# Altium PCB 转叶板-转叶.PcbDoc
Units mm, origin at the board's own origin, x right, y up, seen from the top; angles counter-clockwise.
Board outline 100.1 x 6.1 mm, 2 copper layers (Top Layer, Bottom Layer); 31 components, 28 nets, 115 pads, 0 vias.
Unrouted connection lines stored in the file: 78.
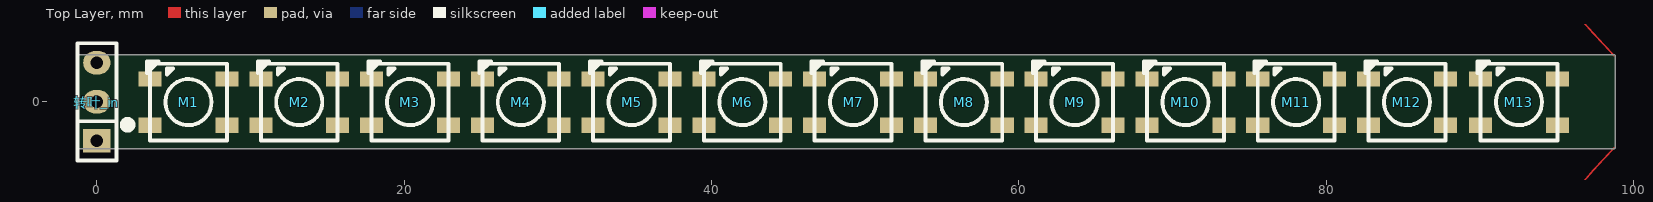
[diagram p0: Top Layer view]
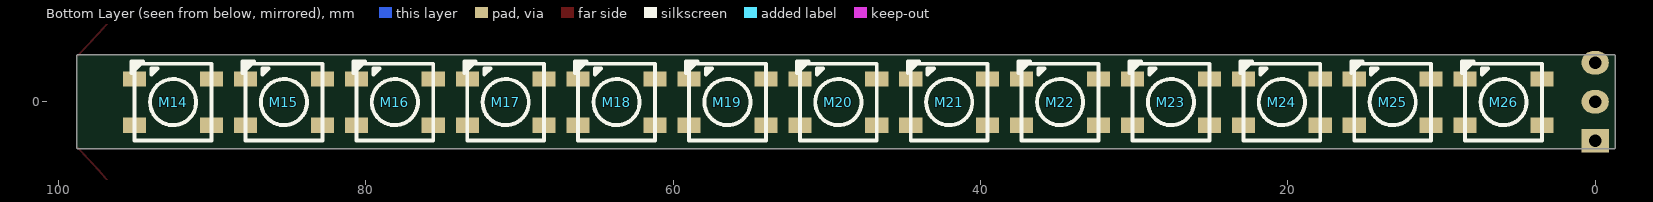
[diagram p1: Bottom Layer view, seen from below]

## Layer stack, top to bottom
Top Solder: solder mask 0.0102, Solder Resist, Dk 3.5
Top Layer: signal copper 0.0356
Dielectric 1: dielectric 0.32, FR-4, Dk 4.8
Bottom Layer: signal copper 0.0356
Bottom Solder: solder mask 0.0102, Solder Resist, Dk 3.5

## Board outline
-1.25,-3.05 cw(c-1.25,-3) -1.3,-3 -1.3,3 cw(c-1.25,3) -1.25,3.05 98.75,3.05 cw(c98.75,3) 98.8,3 98.8,-3 cw(c98.75,-3) 98.75,-3.05

## Design rules (kind name [scope] priority, off if disabled: settings)
Clearance [All] p1: gap=0.254 ignorepadtopadclearanceinfootprint=FALSE except(0: Arc-Hole Track-Hole SMDPad-Hole THPad-Hole Via-Hole Fill-Hole Poly-Hole Region-Hole Text-Hole)
PolygonConnect [All] p1: connectstyle=Relief reliefconductorwidth=0.254 reliefentries=4 polygonreliefangle="90 Angle" airgapwidth=0.254
RoutingVias [All] p1: holewidth=0.711 width=1.27 viastyle="Through Hole" minholewidth=0.711 minwidth=1.27 maxholewidth=0.711 maxwidth=1.27
SolderMaskExpansion [All] p1: expansion=0.102 istentingtop=FALSE
Width [All] p1: maxlimit=0.254 minlimit=0.254 preferedwidth=0.254
30 further rules are at their usual default settings.

## Classes and differential pairs
component class 转叶板-转叶: M1 M2 M3 M4 M5 M6 M7 M8 M9 M10 M11 M12 M13 M14 M15 M16 M17 M18 M19 M20 M21 M22 M23 M24 M25 M26 转叶_in

## Components (designator, comment, footprint, x,y, rotation, side; value= is the part's Value field where it differs from the comment)
1 "Comment" LED-0603B 97.75,50.763 r0 bottom
1_1 "Comment" LED-0603B 97.75,-50.737 r0 bottom
_1 "Comment" LED-0603B 97.75,-50.75 r0 top
M1 "WS2812B" WS2812-NEW 6,0 r90 top
M2 "WS2812B" WS2812-NEW 13.208,0 r90 top
M3 "WS2812B" WS2812-NEW 20.417,0 r90 top
M4 "WS2812B" WS2812-NEW 27.625,0 r90 top
M5 "WS2812B" WS2812-NEW 34.833,0 r90 top
M6 "WS2812B" WS2812-NEW 42.042,0 r90 top
M7 "WS2812B" WS2812-NEW 49.25,0 r90 top
M8 "WS2812B" WS2812-NEW 56.458,0 r90 top
M9 "WS2812B" WS2812-NEW 63.667,0 r90 top
M10 "WS2812B" WS2812-NEW 70.875,0 r90 top
M11 "WS2812B" WS2812-NEW 78.083,0 r90 top
M12 "WS2812B" WS2812-NEW 85.292,0 r90 top
M13 "WS2812B" WS2812-NEW 92.581,0 r90 top
M14 "WS2812B" WS2812-NEW 92.5,0 r90 bottom
M15 "WS2812B" WS2812-NEW 85.285,0 r90 bottom
M16 "WS2812B" WS2812-NEW 78.07,0 r90 bottom
M17 "WS2812B" WS2812-NEW 70.855,0 r90 bottom
M18 "WS2812B" WS2812-NEW 63.64,0 r90 bottom
M19 "WS2812B" WS2812-NEW 56.424,0 r90 bottom
M20 "WS2812B" WS2812-NEW 49.209,0 r90 bottom
M21 "WS2812B" WS2812-NEW 41.994,0 r90 bottom
M22 "WS2812B" WS2812-NEW 34.779,0 r90 bottom
M23 "WS2812B" WS2812-NEW 27.564,0 r90 bottom
M24 "WS2812B" WS2812-NEW 20.349,0 r90 bottom
M25 "WS2812B" WS2812-NEW 13.134,0 r90 bottom
M26 "WS2812B" WS2812-NEW 5.919,0 r90 bottom
转叶_in "留三个焊盘" "Pin HDR1X3/2.54mm-S" 0,-2.54 r180 top
? "Comment" LED-0603B 97.75,50.75 r0 top

## Footprints (in the part's own frame and the unit in brackets; to place one, negate y for a bottom-side part, rotate by r counter-clockwise, add the part's x,y. Pads: shape width x height; smd on the part's side, far side on the other; paste and mask are expansions set on the pad)
LED-0603B [mil]
  rect 50x35 smd: A(0,0.26) K(70,0.26)
  silkscreen extent -36,-28 135,28, body extent 4,-15 66,17, height 24
"Pin HDR1X3/2.54mm-S" [mil]
  rect 70x60 hole 32: 1(0,0)
  oval 70x60 hole 32: 2(0,-100) 3(0,-200)
  silkscreen extent -50,-250 50,50, body extent -50,-250 50,50, height 336
WS2812-NEW [mil]
  rect 39.3x59 smd: 1(-60,-96.85) 2(58.1,-96.85)
  rect 39.3x59.1 smd: 3(58.1,100) 4(-60,100)
  silkscreen extent -99,-97 103,108, body extent -99,-97 97,100, height 40

## Part data
M1 M2 M3 M4 M5 M6 M7 M8 M9 M10 M11 M12 M13 M14 M15 M16 M17 M18 M19 M20 M21 M22 M23 M24 M25 M26: BOM_LCSC Assembly=Yes, BOM_Manufacturer=Worldsemi, BOM_Manufacturer Part=WS2812B, BOM_Supplier=LCSC, BOM_Supplier Part=C114585, Contributor=LCSC, SMT Type=Extend, spicePre=L, spiceSymbolName=WS2812B
转叶_in: library part "Pin HDR1X3", ComponentLink1Description=System, ComponentLink1URL=Connector

## Nets (pads, with @x,y where several pads share a name; then routed paths per layer and width w, separated by ;. In a path a pad name is that pad's centre, name@x,y a point inside that pad or via, vN(x,y) a via of type N, cw(c..) or ccw(c..) an arc to the next point about the centre after c; other vN are vias at no path point)
+5: M1.1 M2.1 M3.1 M4.1 M5.1 M6.1 M7.1 M8.1 M9.1 M10.1 M11.1 M12.1 M13.1 M14.1 M15.1 M16.1 M17.1 M18.1 M19.1 M20.1 M21.1 M22.1 M23.1 M24.1 M25.1 M26.1 转叶_in.1
GND: M1.3 M2.3 M3.3 M4.3 M5.3 M6.3 M7.3 M8.3 M9.3 M10.3 M11.3 M12.3 M13.3 M14.3 M15.3 M16.3 M17.3 M18.3 M19.3 M20.3 M21.3 M22.3 M23.3 M24.3 M25.3 M26.3 转叶_in.3
NetM1_2: M1.2 M2.4
NetM2_2: M2.2 M3.4
NetM3_2: M3.2 M4.4
NetM4_2: M4.2 M5.4
NetM5_2: M5.2 M6.4
NetM6_2: M6.2 M7.4
NetM7_2: M7.2 M8.4
NetM8_2: M8.2 M9.4
NetM9_2: M9.2 M10.4
NetM10_2: M10.2 M11.4
NetM11_2: M11.2 M12.4
NetM12_2: M12.2 M13.4
NetM13_2: M13.2 M14.4
NetM14_2: M14.2 M15.4
NetM15_2: M15.2 M16.4
NetM16_2: M16.2 M17.4
NetM17_2: M17.2 M18.4
NetM18_2: M18.2 M19.4
NetM19_2: M19.2 M20.4
NetM20_2: M20.2 M21.4
NetM21_2: M21.2 M22.4
NetM22_2: M22.2 M23.4
NetM23_2: M23.2 M24.4
NetM24_2: M24.2 M25.4
NetM25_2: M25.2 M26.4
WS2812_DATA: M1.4 转叶_in.2
pads on no net: 1.A 1.K 1_1.A 1_1.K ?.A ?.K _1.A _1.K M26.2
copper on no net: | length 106.1
  Top Layer w0.1: 98.75,-50.75 cw(c122.625,-26.875) 98.75,-3 ; 98.75,3 cw(c122.625,26.875) 98.75,50.75

## Silkscreen, mask and mechanical layers (free items; w line width, h text height)
Top Overlay:
  circle w0.508: c2,-1.5 r0.254
Mechanical 1:
  lines w0.1: 78.75,3 78.75,-3 ; 78.75,-3 -1.25,-3 -1.25,3 98.75,3 98.75,-3 78.75,-3